# EAGLE board MainBoard_V1 (EAGLE 9.6.2)
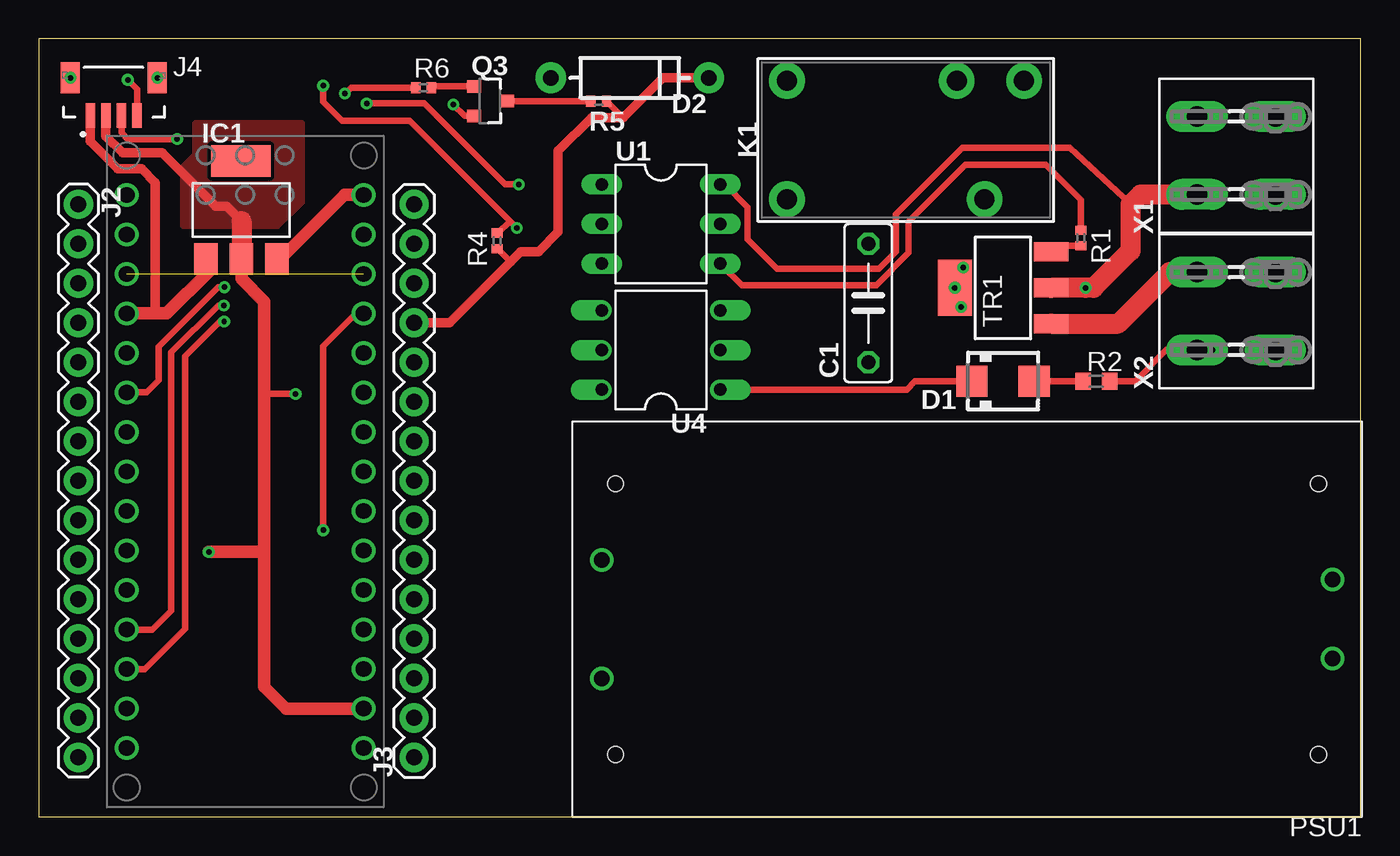
[diagram p0: board, top side]
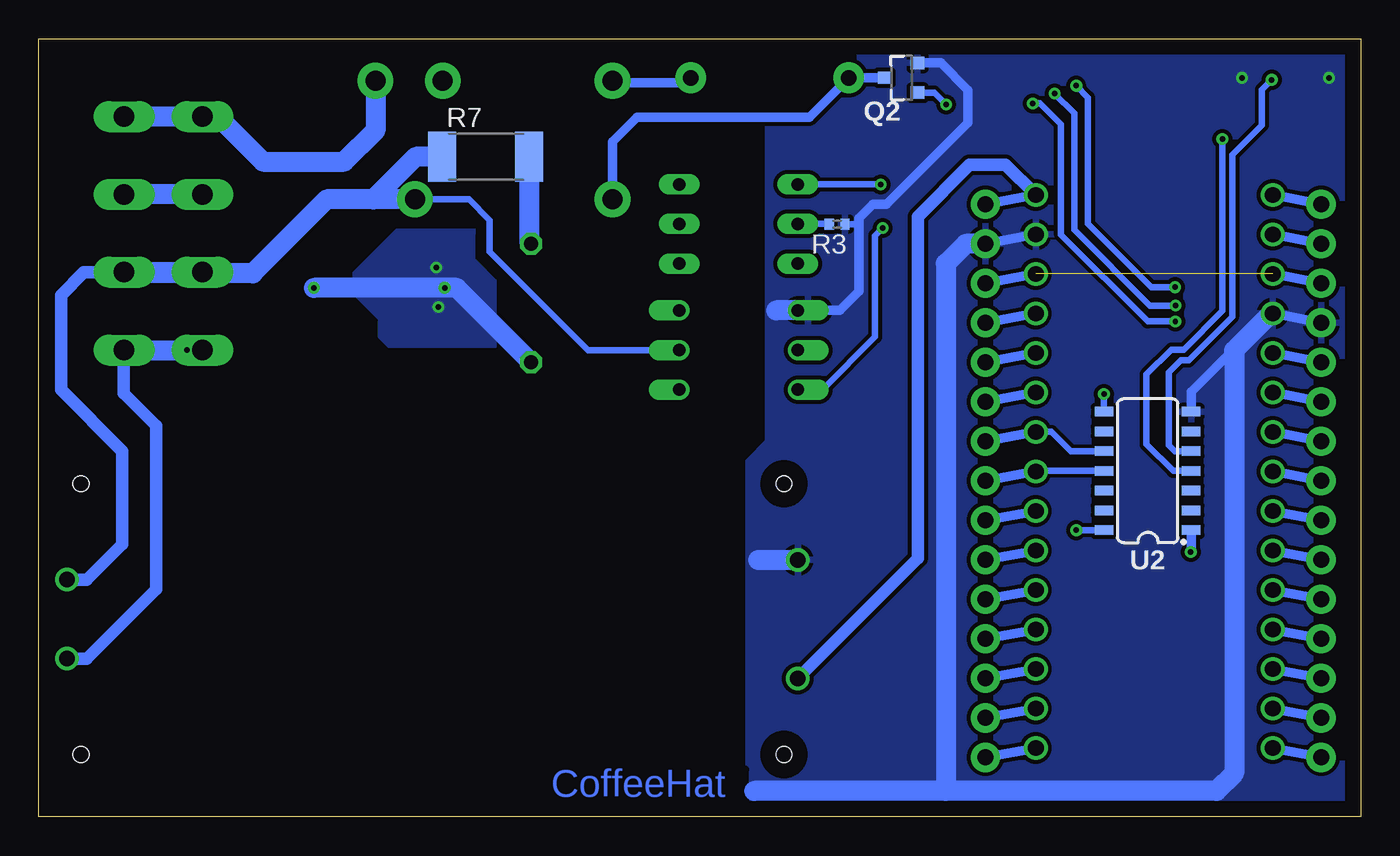
[diagram p1: board, bottom side, seen from below]

Size 85 x 50 mm. Coordinates in mm from the lower left corner, seen from the top.
Outline: 0,0 85,0 85,50 0,50 0,0
Copper layers (1*16): Top 0.035mm / dielectric 1.5mm / Bottom 0.035mm
Design rules "default": minimum track width 6mil, minimum drill 0.35mm, track to track 6mil, track to pad 6mil, pad to pad 6mil, via to via 6mil, smd to smd 6mil, copper to edge 40mil, drill to drill 6mil, minimum pad ring 10mil, minimum via ring 8mil, stop-mask expansion 4mil, vias tented up to drill 0mil, thermal gap 10mil

## Footprints (pad centres in the part's own frame; a part is rotated, then mirrored left to right if it is on the bottom)
C075-032X103 = drill 0.914 octagon: 1 -3.81,0; 2 3.81,0
SMA = smd 2 x 2: A 2,0; C -2,0
DIODE-1N4001 = drill 1 pad 1.981: A -5.08,0; C 5.08,0
SOT223 = smd 1.499 x 2.007: 1 -2.261,-3.15; 2 0.025,-3.15; 3 2.311,-3.15 | smd 3.81 x 2.007: 4 0,3.15
NANO = drill 1.016: 1 -7.62,17.78; 2 -7.62,15.24; 3 -7.62,12.7; 4 -7.62,10.16; 5 -7.62,7.62; 6 -7.62,5.08; 7 -7.62,2.54; 8 -7.62,0; 9 -7.62,-2.54; 10 -7.62,-5.08; 11 -7.62,-7.62; 12 -7.62,-10.16; 13 -7.62,-12.7; 14 -7.62,-15.24; 15 -7.62,-17.78; 16 7.62,-17.78; 17 7.62,-15.24; 18 7.62,-12.7; 19 7.62,-10.16; 20 7.62,-7.62; 21 7.62,-5.08; 22 7.62,-2.54; 23 7.62,0; 24 7.62,2.54; 25 7.62,5.08; 26 7.62,7.62; 27 7.62,10.16; 28 7.62,12.7; 29 7.62,15.24; 30 7.62,17.78
1X15 = drill 1.016 pad 1.88: 1 0,0; 2 2.54,0; 3 5.08,0; 4 7.62,0; 5 10.16,0; 6 12.7,0; 7 15.24,0; 8 17.78,0; 9 20.32,0; 10 22.86,0; 11 25.4,0; 12 27.94,0; 13 30.48,0; 14 33.02,0; 15 35.56,0
JST04_1MM_VERT = smd 0.6 x 1.55: 1 -1.478,0.775; 2 -0.478,0.775; 3 0.522,0.775; 4 1.522,0.775 | smd 1.2 x 2: NC1 -2.778,3.2; NC2 2.822,3.2
RELAY-JZC = drill 1.3 pad 2.286: 1 3.81,-8.89; 2 -3.81,2.032; 3 -3.81,6.35; 4 3.81,3.81; 5 -3.81,-8.89
SM-PLG06 = drill 1: AC_L -23.5,2.54; AC_N -23.5,-2.54; VO+ 23.5,3.81; VO- 23.5,-3.81 | hole 1: -22.6,8.7; -22.6,-8.7; 22.6,8.7; 22.6,-8.7
SOT23-3 = smd 0.8 x 0.9: 1 -0.95,-1; 2 0.95,-1; 3 0,1.1
R0402 = smd 0.6 x 0.7: 1 -0.5,0; 2 0.5,0
R0603 = smd 1 x 1.1: 1 -0.85,0; 2 0.85,0
R2512 = smd 1.8 x 3.2: 1 -2.8,0; 2 2.8,0
SOT223' = smd 1.219 x 2.235: 1 -2.311,-3.099; 2 0,-3.099; 3 2.311,-3.099 | smd 3.6 x 2.2: 4 0,3.099
DIL06 = drill 0.813 long: 1 -2.54,-3.81; 2 0,-3.81; 3 2.54,-3.81; 4 2.54,3.81; 5 0,3.81; 6 -2.54,3.81
SO14 = smd 0.6 x 1.2: 1 -3.81,-2.8; 2 -2.54,-2.8; 3 -1.27,-2.8; 4 0,-2.8; 5 1.27,-2.8; 6 2.54,-2.8; 7 3.81,-2.8; 8 3.81,2.8; 9 2.54,2.8; 10 1.27,2.8; 11 0,2.8; 12 -1.27,2.8; 13 -2.54,2.8; 14 -3.81,2.8
PDIP6_8P89X6P60_ONS = drill 0.813 offset: 1 -2.54,-3.81; 2 0,-3.81; 3 2.54,-3.81; 4 2.54,3.81; 5 0,3.81; 6 -2.54,3.81
SH5-2 = drill 1.321 long: 1 0,-2.515; 2 0,2.515; 3 5.004,-2.515; 4 5.004,2.515

## Placement (x,y rotation side)
C1  10nF  [C075-032X103]  53.34,33.02 90 top
D1  S1M  [SMA]  62,28 0 top
D2  1A/50V/1.1V  [DIODE-1N4001]  38,47.5 0 top
IC1  REG1117  [SOT223]  13,39 0 top
J1  NANO_FOOTPRINTNANO  [NANO]  13.27,22.19 0 top
J2  [1X15]  2.54,39.37 270 top
J3  [1X15]  24.13,3.81 90 top
J4  I2C  [JST04_1MM_VERT]  4.79,44.3 0 top
K1  RELAY-SPDT-JZC-11F  [RELAY-JZC]  57,43.5 270 top
PSU1  SM-PLG06-05  [SM-PLG06]  59.69,12.7 180 top
Q2  600mA/40V  [SOT23-3]  29.5,47.5 90 bottom
Q3  600mA/40V  [SOT23-3]  29,46 270 top
R1  470  [R0402]  67.02,37.2 270 top
R2  220K  [R0603]  68,28 0 top
R3  470  [R0402]  33.67,38.09 180 bottom
R4  10K  [R0402]  29.47,37.01 270 top
R5  10K  [R0402]  36,45.99 0 top
R6  10K  [R0402]  24.73,46.86 0 top
R7  220  [R2512]  56.26,42.42 0 bottom
TR1  Z0107MN  [SOT223']  62,34 90 top
U1  MOC3021M  [DIL06]  40,38.1 270 top
U2  TXB0104  [SO14]  13.7,22.23 90 bottom
U4  MCT2EM  [PDIP6_8P89X6P60_ONS]  40,30 90 top
X1  [SH5-2]  77,40 90 top
X2  AC  [SH5-2]  77,30 90 top

## Library data of the parts
C1 = rcl; SPICEPREFIX: C
D1 = diode
D2 = SparkFun-DiscreteSemi; PROD_ID: DIO-09176
IC1 = burr-brown; MPN: REG1117; OC_FARNELL: 1097566; OC_NEWARK: 14P6981
J1 = SparkFun-Boards
J2 J3 = SparkFun-Connectors
J4 = SparkFun-Connectors; PROD_ID: CONN-14483
K1 = SparkFun-Electromechanical; PROD_ID: COMP-09533; SF_SKU: COM-00100
PSU1 TR1 U1 = discrete
Q2 Q3 = SparkFun-DiscreteSemi; PROD_ID: TRANS-08049
R1-R7 = rcl; SPICEPREFIX: R
U2 = SparkFun-IC-Comms; PROD_ID: IC-11329
U4 = MCT2EM_Sym; COPYRIGHT: Copyright (C) 2021 Ultra Librarian. All rights reserved.; MANUFACTURER_PART_NUMBER: MCT2EM; MFR_NAME: ON Semiconductor
X1 X2 = con-rib; OC_FARNELL: unknown; OC_NEWARK: unknown

## Nets
3V3: IC1.2 J1.17 J3.2 J4.2 U2.1 U2.8
3WAYVALVE: K1.3 X1.3 X1.4
5V: D2.C J1.27 J3.12 K1.5 R4.2 R5.2 U2.14
A0: J1.19 J3.4
A1: J1.20 J3.5
A2: J1.21 J3.6
A3: J1.22 J3.7
A4: J1.23 J3.8 U2.11
A5: J1.24 J3.9 U2.10
A6: J1.25 J3.10
A7: J1.26 J3.11
ACNEG: K1.4 PSU1.AC_N R7.1 TR1.1 U4.2 X2.3 X2.4
ACPOS: PSU1.AC_L R2.2 X2.1 X2.2
AREF: J1.18 J3.3
D0: J1.2 J2.2
D1: J1.1 J2.1
D2: J1.5 J2.5
D3: J1.6 J2.6 R4.1 U4.6
D4: J1.7 J2.7
D5: J1.8 J2.8
D6: J1.9 J2.9
D7: J1.10 J2.10
D8: J1.11 J2.11
D9: J1.12 J2.12 R6.1
D10: J1.13 J2.13 U1.1
D11: J1.14 J2.14
D12: J1.15 J2.15
D13: J1.16 J3.1
GND: IC1.1 J1.4 J1.29 J2.4 J3.14 J4.1 PSU1.VO- Q2.2 R3.1 U2.7 U4.4
N$1: R1.1 U1.4
N$2: R1.2 TR1.3
N$3: R3.2 U1.2
N$4: C1.2 R7.2
N$5: D1.A R2.1
N$6: D1.C U4.1
N$8: Q2.1 Q3.2
N$9: D2.A K1.1 Q2.3
N$10: Q3.3 R5.1
N$11: Q3.1 R6.2
PUMP: C1.1 TR1.2 TR1.4 U1.6 X1.1 X1.2
RESET: J1.3 J1.28 J2.3 J3.13
SCL: J4.4 U2.5
SDA: J4.3 U2.4
VIN: IC1.3 J1.30 J3.15 PSU1.VO+

## Tracks (layer width: path | path; a pad name or v marks a point on that pad's centre or on a via)
3V3  (via drill 0.35)
  Top 0.406: v16.51,27.18 14.5,27.18
  Top 0.61: J4.2 4.31,43.76 5.4,42.67 7.94,42.67 11.37,39.24 12.06,39.24 13.03,38.28
  Top 0.813: IC1.2 13.03,34.58 14.5,33.1 14.5,27.18 14.5,17.02 | 14.5,17.02 14.5,8.36 15.91,6.95 J1.17 | v10.92,17.02 14.5,17.02
  Top 1.27: 13.03,38.28 IC1.2
  Bottom 0.406: U2.8 16.5,27.17
  Bottom 0.61: J3.2 J1.17 | 16.5,27.17 v16.51,27.18 | v10.92,17.02 10.9,17.04 U2.1
  pour Top (isolate 0.254): 10.08,44.58 10.08,42.59 9.27,41.78 9.27,37.97 15.37,37.97 16.89,39.5 16.89,44.58
3WAYVALVE
  Bottom 1.27: K1.3 63.35,44.11 65.36,42.1 70.58,42.1 73.48,45 X1.4 X1.3
5V  (via drill 0.35)
  Top 0.406: v18.29,18.41 18.29,30.23 20.41,32.35 J1.27 | R4.2 29.49,36.51 30.33,35.67 | R5.2 37.53,44.96 37.59,44.96
  Top 0.61: J3.12 26.42,31.75 30.33,35.67 30.99,36.32 32.13,36.32 33.4,37.59 33.4,42.8 35.53,44.93 37.56,44.93 37.59,44.96 40.13,47.5 D2.C
  Bottom 0.406: v18.29,18.41 v18.28,18.42 U2.14
  Bottom 0.61: J3.12 J1.27 | D2.C 43.4,47.18 47.98,47.18 K1.5
A0
  Bottom 0.61: J3.4 J1.19
A1
  Bottom 0.61: J3.5 J1.20
A2
  Bottom 0.61: J3.6 J1.21
A3
  Bottom 0.61: J3.7 J1.22
A4
  Bottom 0.406: U2.11 20.85,22.23 J1.23
  Bottom 0.61: J3.8 J1.23
A5
  Bottom 0.406: J1.24 19.87,24.73 18.64,23.5 U2.10
  Bottom 0.61: J3.9 J1.24
A6
  Bottom 0.61: J3.10 J1.25
A7
  Bottom 0.61: J3.11 J1.26
ACNEG
  Top 1.27: TR1.1 69.41,31.69 72.72,35 X2.4
  Bottom 0.406: U4.2 49.69,30 56.01,36.32 56.01,38.35 57.34,39.69 K1.4
  Bottom 0.813: X2.3 82.1,35 83.58,33.53 83.58,27.44 79.63,23.5 79.63,17.53 81.92,15.24 PSU1.AC_N
  Bottom 1.27: 63.5,39.69 66.48,39.69 71.25,34.92 79.44,34.92 X2.3 X2.4 | R7.1 60.77,42.42 63.5,39.69 | K1.4 63.5,39.69
ACPOS  (via drill 0.35)
  Top 0.406: v75.48,30.01 72.51,30.01 70.5,28 R2.2
  Bottom 0.254: X2.2 v75.48,30.01
  Bottom 0.813: PSU1.AC_L 81.92,10.16 77.47,14.61 77.47,25.15 79.53,27.21 79.53,29.98 X2.1
  Bottom 1.27: X2.1 X2.2
AREF
  Bottom 0.61: J3.3 J1.18
D0
  Bottom 0.61: J2.2 J1.2
D1
  Bottom 0.61: J2.1 J1.1
D2
  Bottom 0.61: J2.5 J1.5
D3  (via drill 0.35)
  Top 0.406: J1.6 6.92,27.27 7.7,28.05 7.7,30.2 11.54,34.04 v11.94,34.04 | v18.29,46.99 18.29,45.95 19.51,44.73 23.85,44.73 30.29,38.29 | 30.29,38.29 v30.73,37.85 | R4.1 29.51,37.51 30.29,38.29
  Bottom 0.406: v11.94,34.04 13.46,34.04 17.53,38.1 17.53,46.23 v18.29,46.99 | v30.73,37.85 31.23,37.35 31.23,30.85 34.62,27.46 U4.6
  Bottom 0.61: J2.6 J1.6
D4
  Bottom 0.61: J2.7 J1.7
D5
  Bottom 0.61: J2.8 J1.8
D6
  Bottom 0.61: J2.9 J1.9
D7
  Bottom 0.61: J2.10 J1.10
D8
  Bottom 0.61: J2.11 J1.11
D9  (via drill 0.35)
  Top 0.406: R6.1 20.07,46.86 v19.68,46.48 | v11.9,32.85 11.52,32.85 8.51,29.84 8.51,13.24 7.3,12.03 J1.12
  Bottom 0.406: v11.9,32.85 13.55,32.85 18.41,37.72 18.41,45.21 v19.68,46.48
  Bottom 0.61: J2.12 J1.12
D10  (via drill 0.35)
  Top 0.406: v11.91,31.84 11.65,31.84 9.4,29.59 9.4,12.1 6.79,9.49 J1.13 | v21.08,45.85 24.77,45.85 29.97,40.64 v30.86,40.64
  Bottom 0.406: v11.91,31.84 13.69,31.84 19.26,37.41 19.26,44.5 20.61,45.85 v21.08,45.85 | U1.1 v30.86,40.64
  Bottom 0.61: J2.13 J1.13
D11
  Bottom 0.61: J2.14 J1.14
D12
  Bottom 0.61: J2.15 J1.15
D13
  Bottom 0.61: J3.1 J1.16
GND  (via drill 0.35)
  Top 0.61: J4.1 3.31,43.42 5.08,41.66 6.6,41.66 7.49,40.77 7.49,32.35
  Top 0.813: J1.4 7.49,32.35 8.22,32.35 10.95,35.08 IC1.1
  Bottom 0.406: R3.1 32.29,38.09 32.27,38.1
  Bottom 0.61: J2.4 J1.4 5.86,32.35 10.9,27.31 U2.7 | J3.14 J1.29 | Q2.2 27,48.45 25.24,46.69 25.24,44.61 30.48,39.37 31.37,39.37 32.27,38.46 32.27,38.1 32.27,33.77 33.5,32.54 U4.4
  Bottom 1.27: J1.4 5.75,32.35 8.13,29.97 8.13,2.79 9.27,1.65 26.67,1.65 | 38.73,16.51 PSU1.VO- 38.1,16.51 | 26.67,1.65 38.99,1.65 | J3.14 25.4,36.83 26.67,35.56 26.67,1.65 | U4.4 37.6,32.54
  other vias: 2.03,47.5 7.62,47.5
  pour Bottom (isolate 0.254): 0,49.53 35.56,49.53 38.1,46.99 38.1,24.13 39.37,22.86 39.37,0 0,0
N$1
  Top 0.406: U1.4 45.21,34.16 53.85,34.16 55.93,36.25 55.93,38.25 59.59,41.91 64.77,41.91 67.02,39.66 R1.1
N$2
  Top 0.406: TR1.3 65.49,36.7 R1.2
N$3
  Bottom 0.406: R3.2 U1.2
N$4
  Bottom 1.27: R7.2 53.46,36.95 C1.2
N$5
  Top 0.406: D1.A R2.1
N$6
  Top 0.406: D1.C 56.35,28 55.81,27.46 U4.1
N$8  (via drill 0.35)
  Top 0.406: Q3.2 27.38,45.05 v26.65,45.78
  Bottom 0.406: Q2.1 27.42,46.55 v26.65,45.78
N$9
  Bottom 0.61: K1.1 48.11,43.39 46.54,44.96 35.46,44.96 D2.A Q2.3
N$10
  Top 0.406: Q3.3 30.11,45.99 R5.1
N$11
  Top 0.406: Q3.1 25.32,46.95 R6.2
PUMP  (via drill 0.35)
  Top 0.406: U1.6 44.11,40.64 45.57,39.18 45.57,37.11 47.46,35.22 54.03,35.22 55.12,36.31 55.12,38.73 59.38,43 66.31,43 70.19,39.39 70.22,39.36 | v59.44,35.31 59.44,34.53 TR1.4 59.31,33.59 v59.31,32.77
  Top 1.27: TR1.2 v67.31,34 67.82,34 70.19,36.38 70.19,39.39 | X1.2 70.86,40 70.22,39.36
  Bottom 1.27: C1.1 58.13,34 v67.31,34 | X1.2 X1.1
  other vias: 58.9,34
  pour Bottom (isolate 0.254): 57.02,37.59 61.98,37.59 64.64,34.92 64.64,33.66 62.99,32 62.99,30.86 62.48,30.35 55.88,30.35 55.75,30.23 55.75,34.42 57.15,35.81 57.15,37.47
RESET  (1 unrouted)
  Bottom 0.61: J2.3 J1.3 | J3.13 J1.28
SCL  (via drill 0.35)
  Top 0.406: J4.4 6.31,46.77 v5.71,47.37
  Bottom 0.406: v5.71,47.37 6.35,46.74 6.35,44.45 8.26,42.55 8.26,32.13 11.05,29.34 11.56,29.34 12.32,28.57 12.32,23.87 11.95,23.5 U2.5
SDA  (via drill 0.35)
  Top 0.406: J4.3 5.31,43.96 5.71,43.56 v8.89,43.56
  Bottom 0.406: v8.89,43.56 8.89,32.51 11.38,30.02 12.17,30.02 13.77,28.43 13.77,23.94 12.06,22.23 U2.4
VIN
  Top 0.813: IC1.3 15.52,35.84 19.65,39.97 J1.30
  Bottom 0.61: J3.15 J1.30
  Bottom 0.813: PSU1.VO+ 28.48,16.6 28.48,38.57 25.15,41.91 22.83,41.91 J1.30

## Text on the board
Bottom: CoffeeHat